# Altium PCB EC3simple.PcbDoc
Units mm, origin at the board's own origin, x right, y up, seen from the top; angles counter-clockwise.
Board outline 152.4 x 101.6 mm, 2 copper layers (Top Layer, Bottom Layer); 40 components, 32 nets, 138 pads, 24 vias.
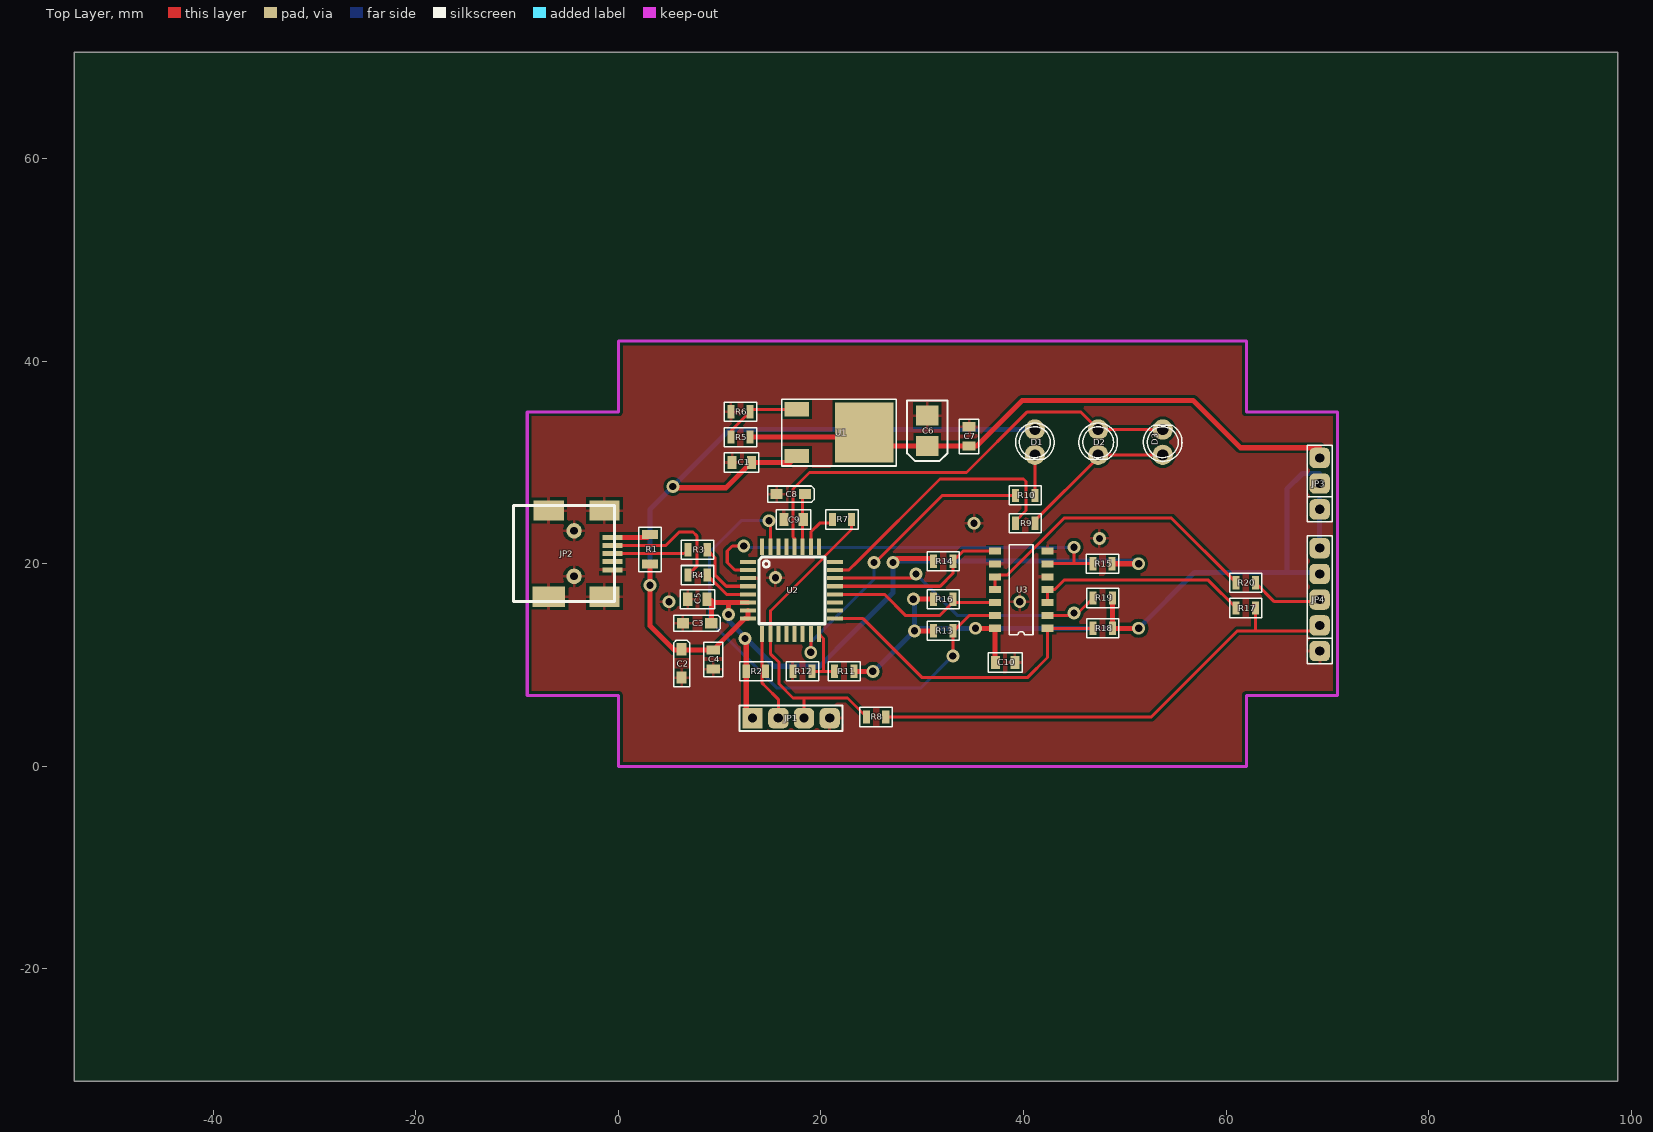
[diagram p0: Top Layer view]
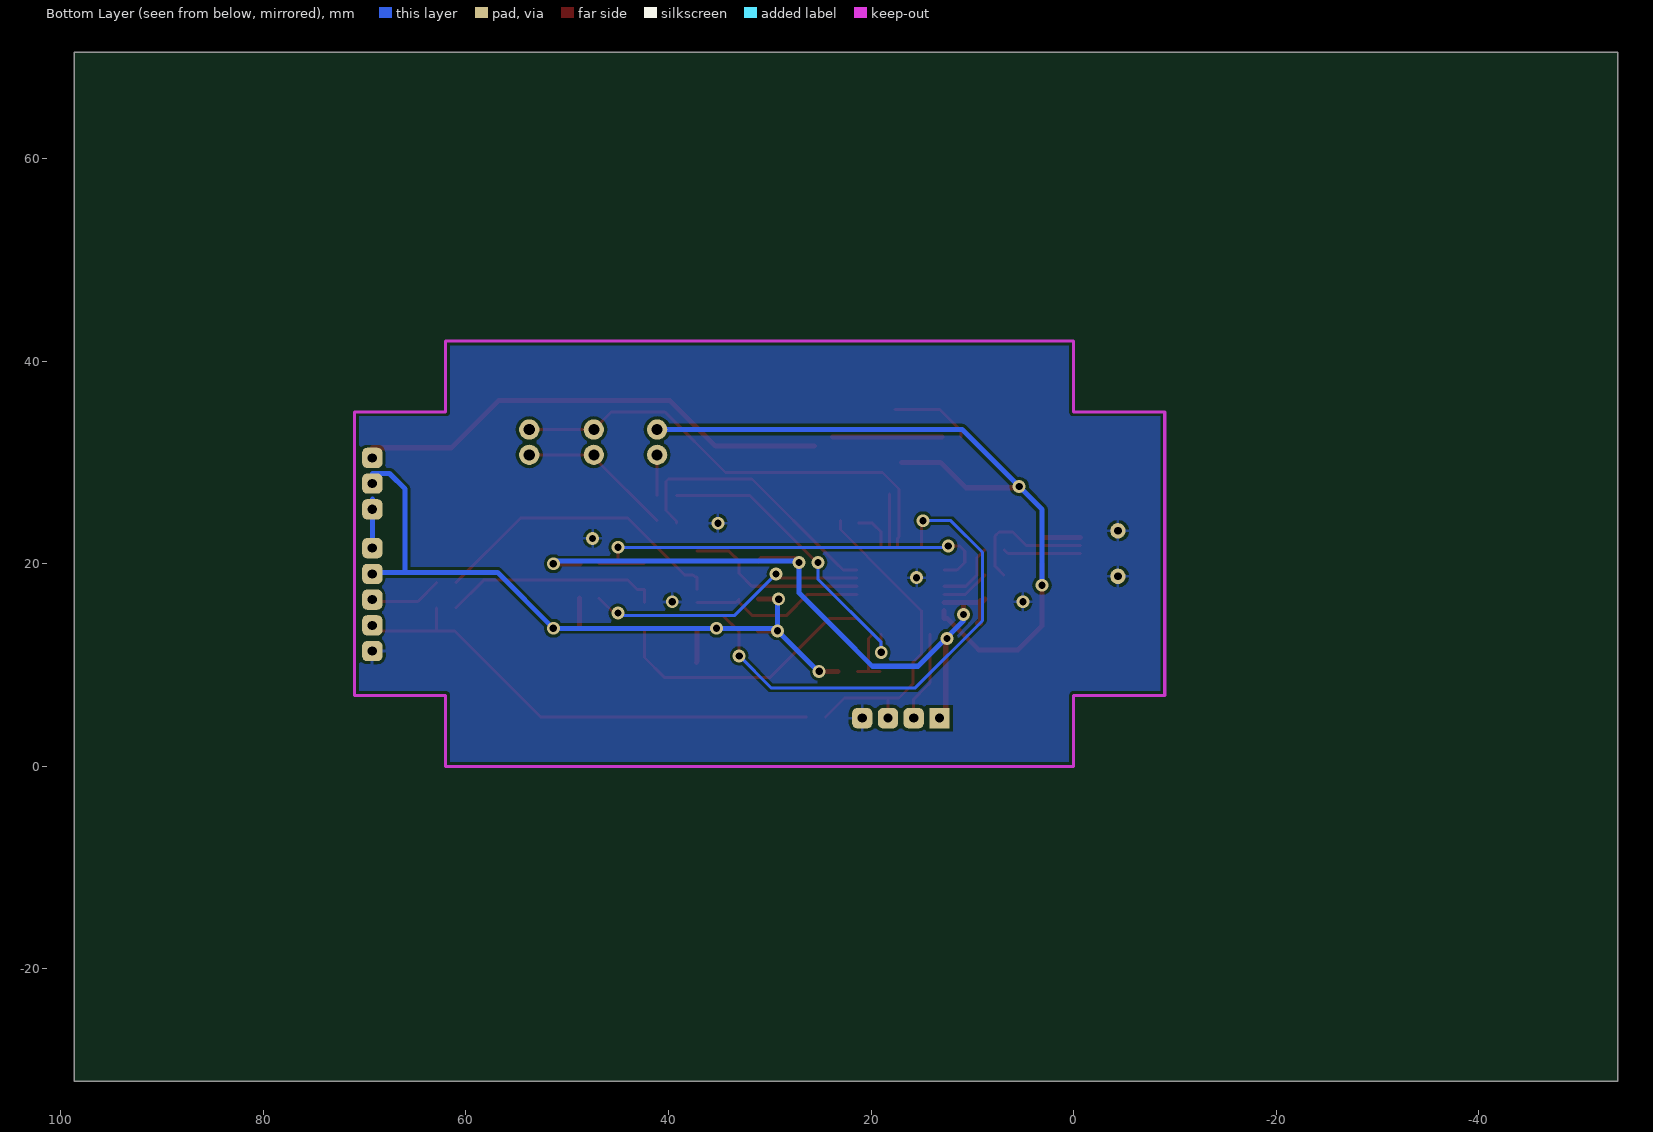
[diagram p1: Bottom Layer view, seen from below]

## Layer stack, top to bottom
Top Layer: signal copper 0.0356
Dielectric: dielectric 0.32, FR-4, Dk 4.8
Bottom Layer: signal copper 0.0356

## Board outline
-53.725,-31.1 98.675,-31.1 98.675,70.5 -53.725,70.5

## Design rules (kind name [scope] priority, off if disabled: settings)
Clearance Clearance_2 [InNamedPolygon('GND-B')] p1: gap=0.3
Clearance Clearance_1 [InNamedPolygon('GND-T')] p2: gap=0.3
Clearance [All] p3: gap=0.254
HoleSize [All] p1: absolutevalues=TRUE maxlimit=8 minlimit=0.025 maxpercent=80.000 minpercent=20.000
MinimumSolderMaskSliver [All] p1: minsoldermaskwidth=0
PolygonConnect PolygonConnect_3 [All vs IsNamedPolygon('GND-B')] p1: connectstyle=Relief reliefconductorwidth=0.3 reliefentries=4 polygonreliefangle="90 Angle"
PolygonConnect PolygonConnect_2 [All vs IsNamedPolygon('GND-T')] p2: connectstyle=Relief reliefconductorwidth=0.3 reliefentries=4 polygonreliefangle="90 Angle"
PolygonConnect PolygonConnect_1 [All vs IsNamedPolygon('GND') Or  IsNamedPolygon('GND')] p3: connectstyle=Relief reliefconductorwidth=0.4 reliefentries=4 polygonreliefangle="90 Angle"
PolygonConnect [All] p4: connectstyle=Relief reliefconductorwidth=0.254 reliefentries=4 polygonreliefangle="90 Angle"
RoutingVias [All] p1: holewidth=0.711 width=1.27 viastyle="Through Hole" minholewidth=0.711 minwidth=1.27 maxholewidth=0.711 maxwidth=1.27
SilkToSilkClearance [All] p1: silktosilkclearance=0
SilkscreenOverComponentPads [All] p1: minsilkscreentomaskgap=0
SolderMaskExpansion [All] p1: expansion=0.102
Width [All] p1: maxlimit=2 minlimit=0.2 preferedwidth=0.3
24 further rules are at their usual default settings.

## Components (designator, comment, footprint, x,y, rotation, side; value= is the part's Value field where it differs from the comment)
C1 "100n" C-0805 13.125,30 r180 top
C2 "10u" TANTAL-A 6.25,8.75 r90 top
C3 "10u" TANTAL-A 6.375,14.125 r0 top
C4 "100n" C-0805 9.375,11.5 r270 top
C5 "100n" C-0805 8.75,16.5 r180 top
C6 "33u" TANTAL-B(3528) 30.5,34.625 r270 top
C7 "100n" C-0805 34.625,31.625 r90 top
C8 "10u" TANTAL-A 15.625,26.875 r0 top
C9 "100n" C-0805 18.25,24.375 r180 top
C10 "100n" C-0805 37.25,10.25 r0 top
D1 "LED" LED-DIP-1 41.125,32 r90 top
D2 "LED" LED-DIP-1 47.375,32 r90 top
D3 "LED" LED-DIP-1 53.75,32 r270 top
JP1 "Header 4" HDR1X4 13.25,4.75 r0 top
JP2 "USB_mini" miniUSBsmd -1.375,16.75 r90 top
JP3 "JUMPER-3" IDC1-3P 69.25,25.375 r90 top
JP4 "CON5" IDC1-5P 69.25,11.375 r90 top
R1 "0" R-1206 3.125,22.875 r270 top
R2 "2k" R-0805 12.625,9.375 r0 top
R3 "22" R-0805 6.875,21.375 r0 top
R4 "22" R-0805 6.875,18.875 r0 top
R5 "240" R-0805 13,32.5 r180 top
R6 "330" R-0805 13,35 r180 top
R7 "1M" R-0805 21.125,24.375 r0 top
R8 "1M5" R-0805 24.5,4.875 r0 top
R9 "470" R-0805 41.125,24 r180 top
R10 "470" R-0805 41.125,26.75 r180 top
R11 "1k5" R-0805 23.25,9.375 r180 top
R12 "1k" R-0805 19.125,9.375 r180 top
R13 "1k" R-0805 31.125,13.375 r0 top
R14 "1k" R-0805 31.125,20.25 r0 top
R15 "1k" R-0805 48.75,20 r180 top
R16 "1k" R-0805 31.125,16.5 r0 top
R17 "47" R-0805 61,15.625 r0 top
R18 "1k" R-0805 46.875,13.625 r0 top
R19 "1k" R-0805 46.875,16.625 r0 top
R20 "47" R-0805 61,18.125 r0 top
U1 "MC33269" SOT-428-(D-PAK) 17.625,35.25 r270 top
U2 "C8051F320" QFP32 12,20.375 r270 top
U3 "74HC125" SO14-(SOT-108-1) 42.375,13.625 r180 top

## Footprints (in the part's own frame and the unit in brackets; to place one, negate y for a bottom-side part, rotate by r counter-clockwise, add the part's x,y. Pads: shape width x height; smd on the part's side, far side on the other; paste and mask are expansions set on the pad)
C-0805 [mm]
  rect 0.9x1.3 smd: 1(0,0) 2(1.9,0)
  silkscreen extent -0.75,-0.95 2.65,0.95
HDR1X4 [mm] "Connector; Header; 4 Position"
  rect 2x2 hole 0.9: 1(0,0)
  rrect50% 2x2 hole 0.9: 2(2.54,0) 3(5.08,0) 4(7.62,0)
  silkscreen extent -1.27,-1.27 8.89,1.27
IDC1-3P [mm]
  rrect50% 2x2 hole 0.9: 1(0,0) 2(2.54,0) 3(5.08,0)
  silkscreen extent -1.25,-1.25 6.33,1.25
IDC1-5P [mm]
  rrect50% 2x2 hole 0.9: 1(0,0) 2(2.54,0) 3(5.08,0) 4(7.62,0) 5(10.16,0)
  silkscreen extent -1.25,-1.25 11.41,1.25
LED-DIP-1 [mm]
  round 2 hole 1.1: A(1.25,0) K(-1.25,0)
  silkscreen extent -1.68,-1.9 1.91,1.9
miniUSBsmd [mm]
  rect 0.5x2 smd: 1(5.85,-0.8) 2(5.05,-0.8) 3(4.25,-0.8) 4(3.45,-0.8) 5(2.65,-0.8)
  rect 2x3.2 smd: 6(0,5.5)
  rect 2x3 smd: 6(0,0) 6(8.5,0) 6(8.5,5.5)
  round 1.524 hole 0.762: 6(2,3) 6(6.5,3)
  silkscreen extent -0.5,-1 9,9
QFP32 [mm]
  rect 0.4x1.6 smd: 1(0.2,0.8) 2(1,0.8) 3(1.8,0.8) 4(2.6,0.8) 5(3.4,0.8) 6(4.2,0.8) 7(5,0.8) 8(5.8,0.8) 17(5.8,9.4) 18(5,9.4) 19(4.2,9.4) 20(3.4,9.4) 21(2.6,9.4) 22(1.8,9.4) 23(1,9.4) 24(0.2,9.4)
  rect 1.6x0.4 smd: 9(7.3,2.2) 10(7.3,3) 11(7.3,3.8) 12(7.3,4.6) 13(7.3,5.4) 14(7.3,6.2) 15(7.3,7) 16(7.3,7.8) 25(-1.3,7.8) 26(-1.3,7) 27(-1.3,6.2) 28(-1.3,5.4) 29(-1.3,4.6) 30(-1.3,3.8) 31(-1.3,3) 32(-1.3,2.2)
  silkscreen extent -0.3,1.9 6.3,8.4
R-0805 [mm]
  rect 0.7x1.3 smd: 1(0,0) 2(1.9,0)
  silkscreen extent -0.65,-0.95 2.55,0.95
R-1206 [mm]
  rect 0.9x1.6 smd: 1(0,0) 2(2.9,0)
  silkscreen extent -0.75,-1.1 3.65,1.1
SO14-(SOT-108-1) [mm]
  rect 1.2x0.7 smd: 1(0,0) 2(0,-1.27) 3(0,-2.54) 4(0,-3.81) 5(0,-5.08) 6(0,-6.35) 7(0,-7.62) 8(5.2,-7.62) 9(5.2,-6.35) 10(5.2,-5.08) 11(5.2,-3.81) 12(5.2,-2.54) 13(5.2,-1.27) 14(5.2,0)
  silkscreen extent 1.43,-8.25 3.77,0.63
SOT-428-(D-PAK) [mm]
  rect 1.4x2.4 smd: 1(0,0) 3(4.6,0)
  rect 5.9x5.75 smd: 2(2.3,6.65)
  silkscreen extent -1,-1.5 5.6,9.82
TANTAL-A [mm]
  rect 1.2x1 smd: 1(0,0) 2(2.8,0)
  silkscreen extent -0.9,-0.8 3.7,0.8
TANTAL-B(3528) [mm]
  rect 2x2.2 smd: 1(0,0) 2(3,0)
  silkscreen extent -1.5,-2 4.5,2

## Part data
C1 C4 C5 C7 C9 C10: library part C
C2 C3 C6 C8: library part C-EL-TAN
JP1: "Header, 4-Pin"
JP3: "Jumper"
R1 R2 R3 R4 R5 R6 R7 R8 R9 R10 R11 R12 R13 R14 R15 R16 R17 R18 R19 R20: library part R
U1: "low dropout adjustable positive voltage regulators"
U3: "Four Buffers with Enable for HiZ state output"

## Via types
v1: diameter 1.27, hole 0.711, Top Layer to Bottom Layer, 24 vias

## Nets (pads, with @x,y where several pads share a name; then routed paths per layer and width w, separated by ;. In a path a pad name is that pad's centre, name@x,y a point inside that pad or via, vN(x,y) a via of type N, cw(c..) or ccw(c..) an arc to the next point about the centre after c; other vN are vias at no path point)
+3V3: C3.2 C5.1 JP1.1 R2.1 R14.1 R15.1 U2.6 | length 71.2
  Top Layer w0.5: C5.1 9.075,16.175 10.875,16.175 ; C5.1@9.175,16.375 C3.2 C3.2@9.5,14.125 ; v1(10.875,15) 10.875,16.175 ; v1(12.5,12.625) 12.625,12.5 R2.1 ; JP1.1@12.625,5.375 R2.1 ; R2.1@12.625,9.5 R2.1 ; U2.6 10.875,16.175 ; v1(27.125,20.125) 27.5,20.5 30.875,20.5 R14.1 ; R15.1 v1@51.125,20
  Bottom Layer w0.5: v1(10.875,15) 10.875,14.375 15.375,9.875 19.875,9.875 23.125,13.125 27.125,17.125 v1(27.125,20.125) 27.125,20.25 51.125,20.25 v1(51.375,20)
C2CK: JP4.2 R8.2 R17.2 | length 48.1
  Top Layer w0.3: R8.2 52.625,4.875 61.125,13.375 JP4.2@68.835,13.375 ; 62.9,13.475 R17.2
C2CK1: JP1.2 R2.2 U2.9 | length 9
  Top Layer w0.3: U2.9 14.2,8.2 14.525,7.875 15.79,6.61 JP1.2
C2D: JP4.3 R20.2 | length 7.1
  Top Layer w0.3: R20.2 64.775,16.25 69,16.25 JP4.3@69.125,16.375
C2D1: JP1.3 R7.2 R8.1 U2.10 | length 32.1
  Top Layer w0.25: 15,15.336 20.381,20.717 ; 20.381,20.756 23.025,23.4
  Top Layer w0.3: 15,15.336 U2.10 15,11.125 15.875,10.25 15.875,8.125 17.25,6.75 18.25,6.75 ; JP1.3@18.33,5.08 JP1.3 18.33,6.67 18.25,6.75 ; 23.025,23.4 R7.2@23.025,24.25 ; R8.1 22.625,6.75 18.25,6.75
GND: C1.2 C2.1 C3.1 C4.2 C5.2 C6.1 C7.2 C8.1 C9.2 C10.2 JP1.4 JP2.5 JP2.6 JP4.1 R6.2 R12.2 U2.3 U3.5 U3.7 U3.9
  other v1: 5,16.25 39.625,16.25 15.5,18.625 47.5,22.5 35.125,24
LED_1: R9.2 U2.23 | length 27.2
  Top Layer w0.3: U2.23 22.75,19.375 23.625,20.25 31.75,28.375 34.75,28.375 40,28.375 40.25,28.125 40.25,25.25 39.225,24.225 R9.2
LED_2: D2.A D3.K U2.28 | length 46.1
  Top Layer w0.3: U2.28 17.4,22.475 17.25,22.625 17.25,27.375 18.875,29 34.375,29 40.375,35 45.625,35 D2.A D3.K
NetC6_2: C6.2 C7.1 JP3.3 R5.1 U1.2 | length 58.3
  Top Layer w0.5: R5.1 U1.2@23.825,32.5 ; U1.2@25.6,31.625 C7.1 35.375,31.625 39.875,36.125 56.75,36.125 61.42,31.455 69.25,31.455
NetD1_K: D1.K R10.1 | length 4
  Top Layer w0.3: R10.1 D1.K
NetD2_K: D2.K D3.A R9.1 | length 15.5
  Top Layer w0.3: R9.1@41.125,24.25 47.25,30.375 47.25,30.625 D2.K D3.A
NetJP2_1: JP2.1 R1.1 | length 3.9
  Top Layer w0.3: R1.1@2.85,22.6 R1.1
  Top Layer w0.5: JP2.1@-0.7,22.6 R1.1@2.85,22.6
NetJP2_2: JP2.2 R4.1 | length 13.4
  Top Layer w0.3: JP2.2@-0.7,21.8 4.675,21.8 6,23.125 7.375,23.125 7.75,22.75 7.75,19.75 R4.1
NetJP2_3: JP2.3 R3.1 | length 7.7
  Top Layer w0.3: JP2.3@-0.7,21 0.625,21 6.5,21 R3.1
NetR3_2: R3.2 U2.4 | length 6.5
  Top Layer w0.3: R3.2 9.529,20.621 9.529,19.692 9.529,18.904 10.658,17.775 U2.4
NetR4_2: R4.2 U2.5 | length 4.8
  Top Layer w0.3: R4.2 10.675,16.975 U2.5
NetR5_2: R5.2 R6.1 U1.1 | length 8
  Top Layer w0.3: R5.2 11.1,33.1 13.25,35.25 U1.1
NetR17_1: R17.1 U3.3 U3.4 | length 21.4
  Top Layer w0.3: U3.3 U3.4 43.06,17.435 44,18.375 58.25,18.375 R17.1
NetR20_1: R20.1 U3.10 U3.11 | length 30.1
  Top Layer w0.3: U3.11 U3.10 37.394,18.705 37.564,18.875 38.375,18.875 44,24.5 54.625,24.5 R20.1
OE_TCK: R13.2 U2.31 U3.13 | length 51.9
  Top Layer w0.3: v1(14.875,24.25) 15,24.125 U2.31 ; v1(33.025,10.9) R13.2 33.125,13.375 34.645,14.895 U3.13
  Bottom Layer w0.3: v1(14.875,24.25) 12.125,24.25 9,21.125 9,14.375 15.625,7.75 29.875,7.75 v1(33.025,10.9)
OE_TDI: R18.1 U2.17 U3.1 | length 31.7
  Top Layer w0.3: U2.17 24.175,14.575 30,8.75 40.375,8.75 42.375,10.75 U3.1 R18.1@47,13.625
P10: R7.1 U2.26 | length 4.1
  Top Layer w0.3: U2.26 19,23.125 19.875,24 R7.1@21.25,24
P23: R10.2 U2.15 | length 29.9
  Top Layer w0.3: v1(19,11.25) U2.15 ; v1@25.375,20.125 32,26.75 R10.2
  Bottom Layer w0.3: v1(19,11.25) 19,11.375 19,12.25 25.25,18.5 v1(25.25,20.125)
TCK_IN: R14.2 U2.21 U3.8 | length 17.9
  Top Layer w0.3: U2.21 31.775,17.775 33.025,19.025 R14.2 34.02,21.245 U3.8
TCK_OUT: R16.2 U2.20 U3.12 | length 17.5
  Top Layer w0.3: U2.20 26.275,16.975 28.375,14.875 31.709,14.875 R16.2@33.179,16.346 ; R16.2 R16.2@33.179,16.346 ; U3.12 33.36,16.165 R16.2@33.179,16.346
TDI_IN: R15.2 U2.2 U3.6 | length 43.9
  Top Layer w0.3: v1(12.375,21.75) 11.25,21.75 10.75,21.25 10.75,20.125 11.5,19.375 U2.2 ; U3.6@42.4,20 45,20 ; v1(45,21.625) 45,20 ; R15.2 45,20
  Bottom Layer w0.3: v1@12.375,21.625 v1@44.875,21.625
TDI_OUT: R19.1 U2.22 U3.2 | length 30.5
  Top Layer w0.3: U2.22 v1@29.375,18.575 ; U3.2 45.145,14.895 R19.1
  Bottom Layer w0.3: v1(29.375,19) 33.5,14.875 v1@45,14.875
  other v1: 45,15.125
V_BUF: C10.1 JP3.2 JP4.4 R11.1 R13.1 R16.1 R18.2 R19.2 U3.14 | length 79
  Top Layer w0.5: R11.1 v1@25,9.375 ; v1@29.5,13.375 R13.1 ; v1@29.5,16.5 R16.1 ; v1(35.25,13.625) U3.14 37.175,10.325 C10.1 ; R19.2 R18.2 v1@51,13.625
  Bottom Layer w0.5: v1(25.125,9.375) 25.25,9.375 v1(29.25,13.375) ; v1(29.125,16.5) 29.25,16.375 v1(29.25,13.375) ; JP4.4@69.245,19.125 66,19.125 ; 69.25,28.915 67.54,28.915 66,27.375 66,19.125 ; v1(29.25,13.375) 29.5,13.625 v1(35.25,13.625) v1(51.375,13.625) 56.875,19.125 66,19.125
V_EXT: JP3.1 JP4.5 | length 4.7
  Bottom Layer w0.5: JP4.5@69.25,21.625 69.25,26.375
V_USB: C1.1 C2.2 C4.1 D1.A R1.2 U1.3 U2.7 U2.8 | length 80.5
  Top Layer w0.5: R1.2 v1(3.125,17.875) 3.125,13.875 5.5,11.5 C4.1 12.45,14.575 U2.8 U2.7 ; v1@5.125,27.5 10.625,27.5 C1.1 U1.3@16.975,30
  Bottom Layer w0.5: v1(3.125,17.875) 3.125,25.375 11,33.25 D1.A
  other v1: 5.375,27.625
VBUF_AI: R11.2 R12.1 U2.16 | length 6.1
  Top Layer w0.3: R12.1 R11.2 ; U2.16 20.25,12.625 20.25,9.375
VREF: C8.2 C9.1 U2.27 | length 5.2
  Top Layer w0.3: U2.27 C8.2@18.2,26.875
pads on no net: JP2.4 U2.1 U2.11 U2.12 U2.13 U2.14 U2.18 U2.19 U2.24 U2.25 U2.29 U2.30 U2.32

## Polygon pours and split planes (outlines as drawn)
GND on Top Layer "GND-T" (solid, remove dead copper, pour order 1001): -8.75,0 71.125,0 71.125,42.375 71.25,42.5 -8.75,42.5
GND on Bottom Layer "GND-B" (solid, remove dead copper, pour order 1000): -8.625,0 71.25,0 71.25,42.5 71.125,42.375 -8.75,42.375

## Keep-outs
Keep-Out Layer:
  lines w0.3: -9,7 -9,35 0,35 0,42 62,42 62,35 71,35 71,7 62,7 62,0 0,0 0,7 -9,7

## Silkscreen, mask and mechanical layers (free items; w line width, h text height)
Mechanical 1:
  lines w0.3: -15,-5 75,-5 75,45 -15,45 -15,-5